# EAGLE board opto_endstop (EAGLE 5.02)
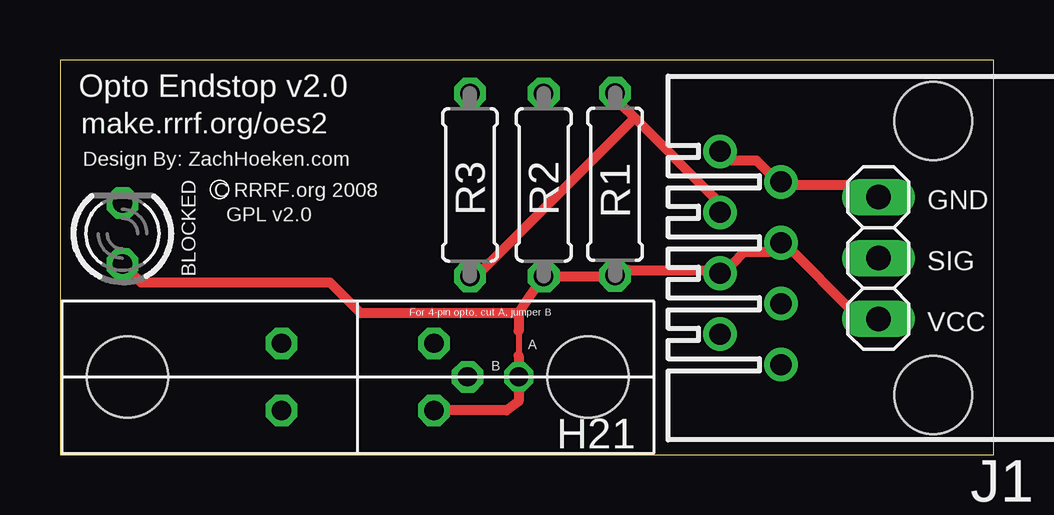
[diagram p0: board, top side]
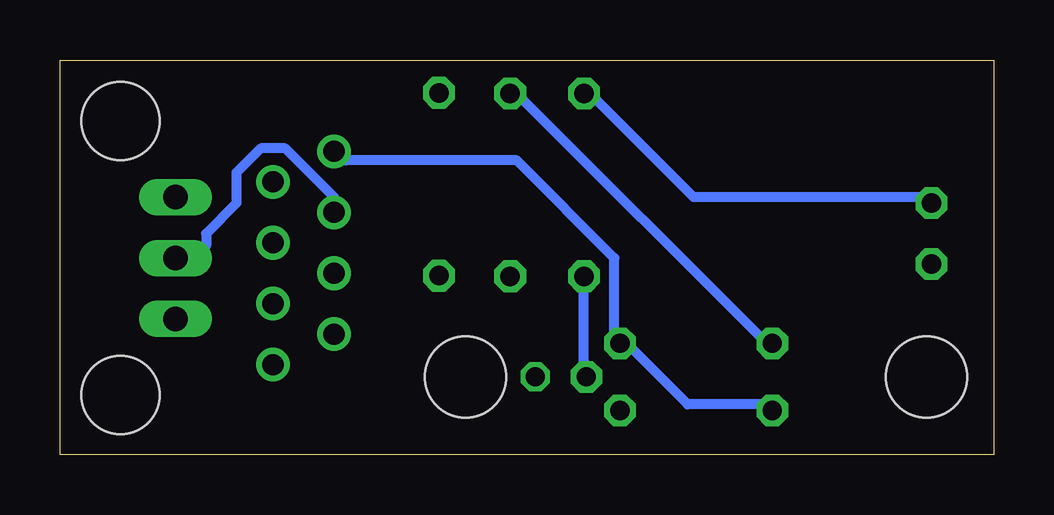
[diagram p1: board, bottom side, seen from below]

Size 38.91 x 16.45 mm. Coordinates in mm from the lower left corner, seen from the top.
Outline: 0,0 38.91,0 38.91,16.45 0,16.45 0,0
Copper layers (1*16): Top 0.035mm / dielectric 1.5mm / Bottom 0.035mm
Design rules "default": minimum track width 10mil, minimum drill 24mil, track to track 8mil, track to pad 8mil, pad to pad 8mil, via to via 8mil, smd to smd 8mil, copper to edge 40mil, drill to drill 8mil, minimum pad ring 10mil, minimum via ring 8mil, stop-mask expansion 4mil, vias tented up to drill 0mil, thermal gap 10mil
Net classes: 0 default: width 0.406 mm, clearance 0.406 mm

## Footprints (pad centres in the part's own frame; a part is rotated, then mirrored left to right if it is on the bottom)
520426-4 = drill 0.889 round: 1 -4.445,6.35; 2 -3.175,8.89; 3 -1.905,6.35; 4 -0.635,8.89; 5 0.635,6.35; 6 1.905,8.89; 7 3.175,6.35; 8 4.445,8.89 | hole 3.251: -5.715,0; 5.715,0
1X03 = drill 1.016 long: 1 -2.54,0; 2 0,0; 3 2.54,0
LED3MM = drill 0.813 octagon: A -1.27,0; K 1.27,0
0207/7 = drill 0.813 octagon: 1 -3.81,0; 2 3.81,0
H21 = drill 0.8 octagon: 1 9.169,4.572; 2 9.169,1.778; 3 15.519,1.778; 4 16.916,3.175; 5 15.519,4.572 | hole 3.378: 2.743,3.175; 21.946,3.175

## Placement (x,y rotation side)
J1  [520426-4]  36.39,8.2 90 top
JP1  [1X03]  34.1,8.2 90 top
LED1  [LED3MM]  2.6,9.22 90 top
R1  10K  [0207/7]  23.13,11.27 270 top
R2  220  [0207/7]  20.15,11.25 270 top
R3  1K  [0207/7]  17.08,11.25 270 top
U$1  H21LOB  [H21]  0.06,0.07 0 top

## Library data of the parts
J1 = con-amp
JP1 = pinhead
LED1 = led
R1-R3 = resistor
U$1 = reprap

## Nets
GND: J1.7 J1.8 JP1.3 U$1.2 U$1.5
N$1: LED1.K R3.1
N$2: J1.6 JP1.2 R1.1 R3.2 U$1.4
N$4: R2.1 U$1.1
VCC: J1.4 J1.5 JP1.1 LED1.A R1.2 R2.2 U$1.3

## Tracks (layer width: path | path; a pad name or v marks a point on that pad's centre or on a via)
GND
  Top 0.406: JP1.3 32.83,11.25 30.54,11.25 J1.7 29.53,11.76 29.02,12.26 28,12.26 J1.8
  Bottom 0.406: U$1.2 9.72,2.1 12.76,2.1 15.05,4.39 U$1.5 15.81,5.15 15.81,8.2 19.88,12.26 26.99,12.26 J1.8
N$1
  Bottom 0.406: LED1.K 3.11,10.74 12.51,10.74 16.57,14.8 R3.1
N$2
  Top 0.406: 23.94,14.04 27.24,10.74 J1.6 | 23.94,14.04 23.43,14.55 R1.1 | 23.94,14.04 17.59,7.69 R3.2
  Bottom 0.406: U$1.4 17.08,3.88 R3.2 | JP1.2 32.83,8.71 32.83,9.22 31.56,10.49 31.56,11.76 30.54,12.77 29.53,12.77 27.5,10.74 J1.6
N$4
  Bottom 0.406: U$1.1 9.72,4.9 19.62,14.8 R2.1
VCC  (via drill 0.8)
  Top 0.254: 19.11,5.15 19.11,4.14
  Top 0.406: JP1.1 32.83,6.17 30.54,8.45 J1.5 29.53,8.45 28.51,8.45 28,7.95 J1.4 26.99,7.69 23.69,7.69 R1.2 | R1.2 22.67,7.44 | 19.11,5.91 12.51,5.91 11.24,7.18 3.37,7.18 LED1.A | 19.11,4.14 v19.11,3.25 19.11,2.23 18.61,1.85 U$1.3 | 19.11,5.91 19.11,5.15 | 19.11,5.91 20.13,7.44 R2.2 23.05,7.44 R1.2
  Bottom 0.406: R2.2 20.13,7.44

## Text on the board
tPlace: Opto Endstop v2.0 | make.rrrf.org/oes2 | Design By: ZachHoeken.com | C RRRF.org 2008 | GPL v2.0 | GND | BLOCKED | SIG | For 4-pin opto, cut A, jumper B | A | VCC | B